# Altium PCB PCB1.PcbDoc
Units mm, origin at the board's own origin, x right, y up, seen from the top; angles counter-clockwise.
Board outline 42 x 21 mm, 2 copper layers (Top Layer, Bottom Layer); 66 components, 73 nets, 223 pads, 101 vias.
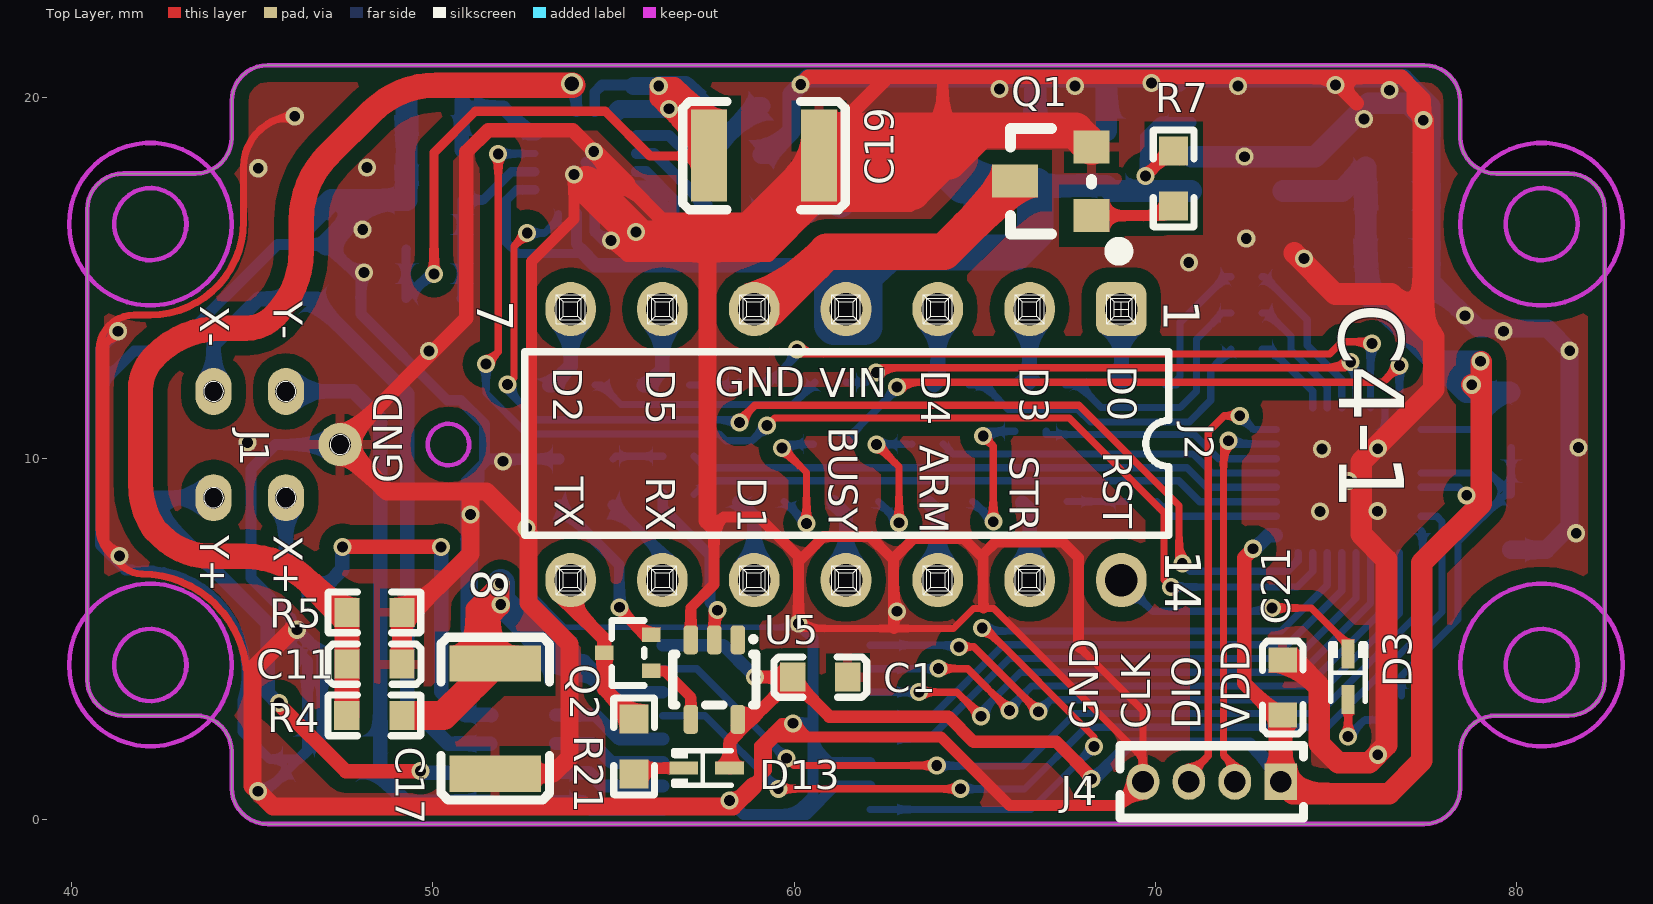
[diagram p0: Top Layer view]
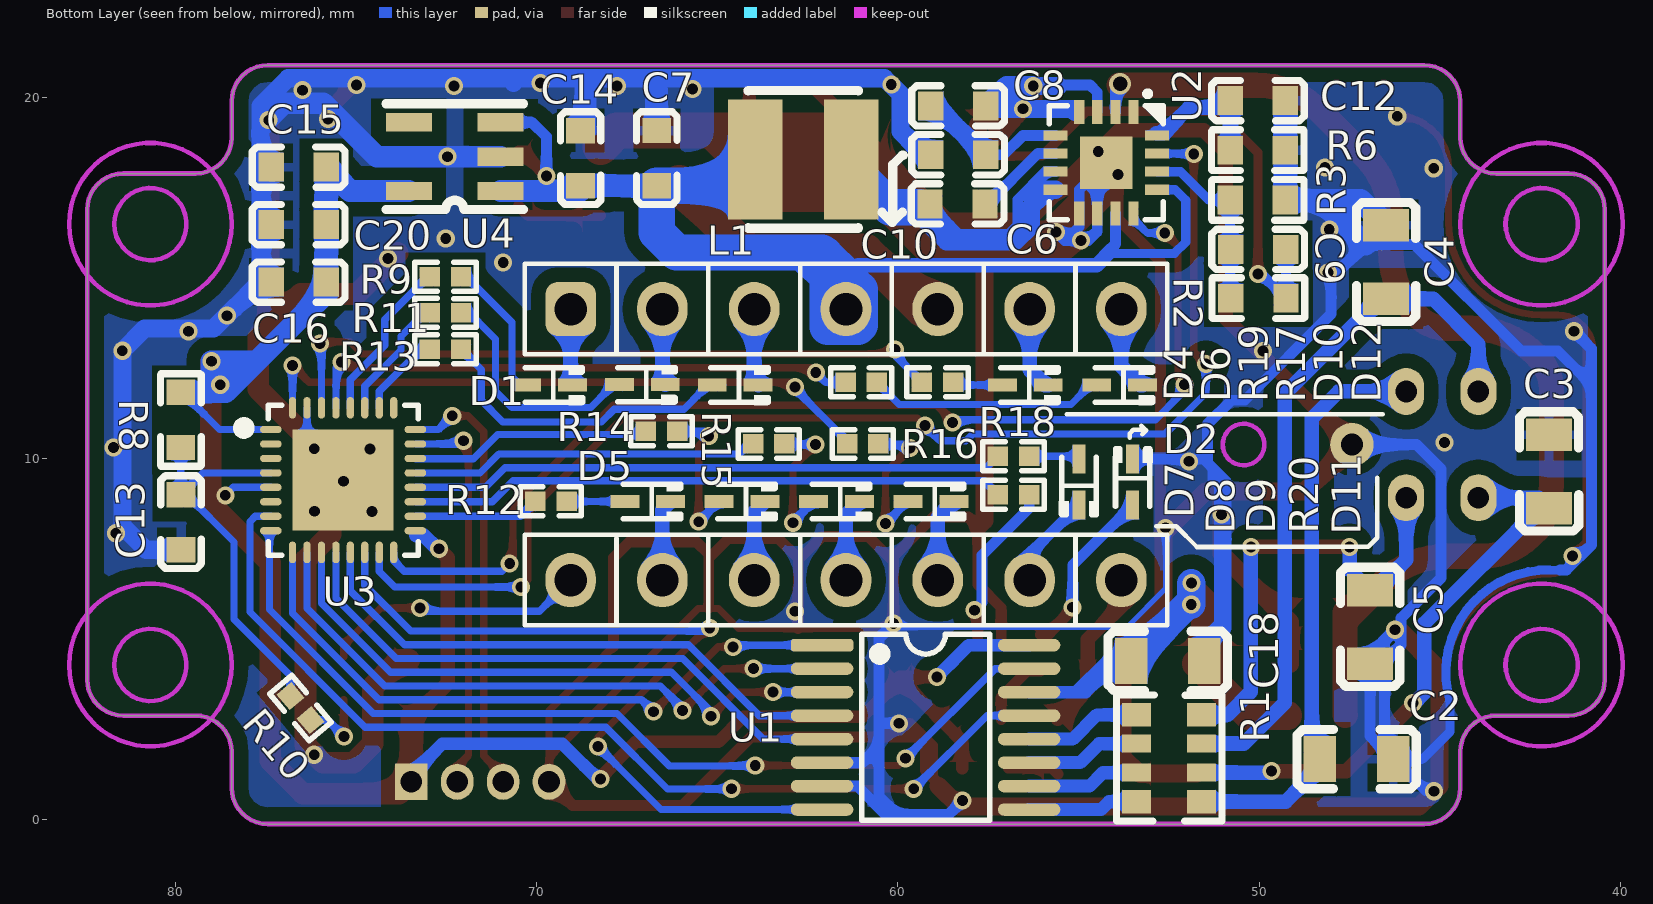
[diagram p1: Bottom Layer view, seen from below]

## Layer stack, top to bottom
Top Solder: solder mask 0.0102, Solder Resist, Dk 3.5
Top Layer: signal copper 0.0356
Dielectric1: dielectric 0.32, FR-4, Dk 4.8
Bottom Layer: signal copper 0.0356
Bottom Solder: solder mask 0.0102, Solder Resist, Dk 3.5

## Board outline
41.434,2.884 43.434,2.884 cw(c43.434,1.884) 44.434,1.884 44.434,0.884 ccw(c45.434,0.884) 45.434,-0.116 77.434,-0.116 ccw(c77.434,0.884) 78.434,0.884 78.434,1.884 cw(c79.434,1.884) 79.434,2.884 81.434,2.884 ccw(c81.434,3.884) 82.434,3.884 82.434,16.884 ccw(c81.434,16.884) 81.434,17.884 79.434,17.884 cw(c79.434,18.884) 78.434,18.884 78.434,19.884 ccw(c77.434,19.884) 77.434,20.884 45.434,20.884 ccw(c45.434,19.884) 44.434,19.884 44.434,18.884 cw(c43.434,18.884) 43.434,17.884 41.434,17.884 ccw(c41.434,16.884) 40.434,16.884 40.434,3.884 ccw(c41.434,3.884)

## Design rules (kind name [scope] priority, off if disabled: settings)
Clearance [All] p1: gap=0.4
PolygonConnect PolygonConnect_1 [IsVia] p1: connectstyle=Direct reliefconductorwidth=0.254 reliefentries=4 polygonreliefangle="90 Angle" airgapwidth=0.254
PolygonConnect [All] p2: connectstyle=Relief reliefconductorwidth=0.254 reliefentries=4 polygonreliefangle="90 Angle" airgapwidth=0.254
RoutingVias [All] p1: holewidth=0.3 width=0.5 viastyle="Through Hole" minholewidth=0.15 minwidth=0.2 maxholewidth=0.711 maxwidth=1.27
SilkToSolderMaskClearance SilkscreenOverComponentPads [IsPad] p1: minsilkscreentomaskgap=0.254 clearancetoexposedcopper=TRUE
SolderMaskExpansion [All] p1: expansion=0.102
Width [All] p1: maxlimit=2.54 minlimit=0.01 preferedwidth=0.254
29 further rules are at their usual default settings.

## Classes and differential pairs
component class DAC_PART: C1 C2 C3 C4 C5 C18 J1 R1 U1
component class DC_BOOST_PART: C6 C7 C8 C9 C10 C11 C12 C17 C19 L1 R2 R3 R4 R5 R6 U2
component class MCU_PART: C13 J4 R8 U3
component class POWER_PART: C14 C15 C16 C20 C21 D1 D2 D3 D4 D5 D6 D7 D8 D9 D10 D11 D12 D13 J2 Q1 Q2 R7 R9 R10 R11 R12 R13 R14 R15 R16 R17 R18 R19 R20 R21 U4 U5

## Components (designator, comment, footprint, x,y, rotation, side; value= is the part's Value field where it differs from the comment)
C1 "106/25V" 0603C/1 60.722,3.95 r180 top
C2 "104/200V" 0805C 47.304,1.68 r0 bottom
C3 "104/200V" 0805C 41.98,9.64 r270 bottom
C4 "104/200V" 0805C 46.49,15.436 r270 bottom
C5 "104/200V" 0805C 46.93,5.34 r90 bottom
C6 "104/100V" 0603C/1 58.347,17.043 r0 bottom
C7 "106/25V" 0603C/1 66.67,18.311 r90 bottom
C8 "224/50V" 0603C/1 58.329,19.758 r0 bottom
C9 "103/200V" 0603C/1 50.028,15.787 r0 bottom
C10 "224/50V" 0603C/1 58.329,18.404 r0 bottom
C11 "103/200V" 0603C/1 48.388,4.309 r0 top
C12 "104/100V" 0603C/1 50.037,19.901 r180 bottom
C13 "105" 0603C/1 79.836,8.236 r90 bottom
C14 "104" 0603C/1 68.78,18.31 r270 bottom
C15 "106/25V" 0603C/1 76.58,18.06 r180 bottom
C16 "104" 0603C/1 76.58,14.88 r180 bottom
C17 "334/200V" 1210c 51.73,2.8 r270 top
C18 "104/200V" 0805C 52.53,4.4 r0 bottom
C19 "334/200V" 1210c 59.164,18.38 r0 top
C20 "106/25V" 0603C/1 76.58,16.47 r180 bottom
C21 "106/25V" 0603C/1 73.52,3.66 r270 top
D1 "1N4148WT" SOD-523_L1.2-W0.8 69.64,12.03 r0 bottom
D2 "1N4148WT" SOD-523_L1.2-W0.8 53.5,9.35 r270 bottom
D3 "1N4148WT" SOD-523_L1.2-W0.8 75.33,3.959 r270 top
D4 "1N4148WT" SOD-523_L1.2-W0.8 67.07,12.04 r0 bottom
D5 "1N4148WT" SOD-523_L1.2-W0.8 66.92,8.81 r0 bottom
D6 "1N4148WT" SOD-523_L1.2-W0.8 64.5,12.03 r0 bottom
D7 "1N4148WT" SOD-523_L1.2-W0.8 64.308,8.81 r0 bottom
D8 "1N4148WT" SOD-523_L1.2-W0.8 61.696,8.81 r0 bottom
D9 "1N4148WT" SOD-523_L1.2-W0.8 59.084,8.81 r0 bottom
D10 "1N4148WT" SOD-523_L1.2-W0.8 56.472,12.03 r0 bottom
D11 "1N4148WT" SOD-523_L1.2-W0.8 54.99,9.35 r90 bottom
D12 "1N4148WT" SOD-523_L1.2-W0.8 53.86,12.03 r0 bottom
D13 "1N4148WT" SOD-523_L1.2-W0.8 57.58,1.43 r0 top
J1 "CON5" DUT_1XN_1.2_2.0 45.684,10.384 r0 top locked
J2 "DCOM14" DIP14-300 61.434,10.384 r270 top locked
J4 "J-LINK SWD" HDR-TH_4P-P1.27-V-0.6 71.557,1.052 r180 top
L1 "SNR4018K-100M" L3.0-W3.0 62.617,18.277 r0 bottom
Q1 "AO3454" SOT-23-N 68.23,16.72 r90 top
Q2 "WST6008" SOT-523-3_L1.6-W0.8-P1.00-LS1.6 55.4,4.62 r0 top
R1 "0R" 4R0603/1 52.496,1.706 r180 bottom
R2 "1M" 0603R/1#1 50.021,14.434 r180 bottom
R3 "20K" 0603R/1#1 50.042,17.153 r0 bottom
R4 "51R" 0603R/1#1 48.383,2.89 r180 top
R5 "1M" 0603R/1#1 48.385,5.74 r0 top
R6 "10K" 0603R/1#1 50.042,18.529 r0 bottom
R7 "10K" 0603R/1#2 70.5,17.75 r90 top
R8 "5K6" 0603R/1#1 79.842,11.066 r90 bottom
R9 "1K" 0402R/1 72.52,15.03 r180 bottom
R10 "1K" 0402R/1 76.528,3.092 r50 bottom
R11 "1K" 0402R/1 72.52,14.025 r180 bottom
R12 "1K" 0402R/1 69.6,8.81 r0 bottom
R13 "1K" 0402R/1 72.52,13.02 r180 bottom
R14 "1K" 0402R/1 66.54,10.75 r0 bottom
R15 "1K" 0402R/1 63.57,10.4 r0 bottom
R16 "1K" 0402R/1 60.97,10.4 r0 bottom
R17 "1K" 0402R/1 58.903,12.105 r180 bottom
R18 "1K" 0402R/1 56.797,10.06 r0 bottom
R19 "1K" 0402R/1 61.01,12.105 r180 bottom
R20 "1K" 0402R/1 56.797,9 r0 bottom
R21 "1K" 0603R/1#2 55.57,2.03 r270 top
U1 "AD5504" TSSOP-16_L5.0-W4.4-P0.65-LS6.4-BL 59.231,2.558 r270 bottom locked
U2 "LT3482" QFN-16_L3.0-W3.0-P0.50-BL-EP1.7 54.23,18.186 r0 bottom
U3 "AT32F415KBU7-4" QFN-32_L4.0-W4.0-P0.40-BL-EP2.7 75.35,9.4 r270 bottom
U4 "SPX3819M5-L-3-3" SOT-23-5 70.99,17.4 r0 bottom
U5 "SN74LVC1G04DCKR" SC-70-5_L2.1-W1.3-P0.65-LS2.1-TL 57.79,3.88 r270 top

## Footprints (in the part's own frame and the unit in brackets; to place one, negate y for a bottom-side part, rotate by r counter-clockwise, add the part's x,y. Pads: shape width x height; smd on the part's side, far side on the other; paste and mask are expansions set on the pad)
4R0603/1 [mm]
  rect 0.8x0.65 smd: 1(-0.9,1.2) 2(0.9,1.2) 7(-0.9,-1.2) 8(0.9,-1.2)
  rect 0.8x0.5 smd: 3(-0.9,0.4) 4(0.9,0.4) 5(-0.9,-0.4) 6(0.9,-0.4)
  silkscreen extent -1.45,-1.74 1.47,1.75
0402R/1 [mm]
  rect 0.566x0.54 smd paste-100 mask+0.051: 1(-0.433,0) 2(0.433,0)
  silkscreen extent -0.84,-0.4 0.85,0.4
0603C/1 [mm]
  rect 0.7x0.8 smd: 1(-0.762,0) 2(0.762,0)
  silkscreen extent -1.28,-0.56 1.28,0.56
0603R/1#1 [mm]
  rect 0.7x0.8 smd: 1(-0.762,0) 2(0.762,0)
  silkscreen extent -1.28,-0.56 1.28,0.56
0603R/1#2 [mm]
  rect 0.8x0.8 smd: 1(-0.762,0) 2(0.762,0)
  silkscreen extent -1.34,-0.56 1.34,0.57
0805C [mm]
  rect 0.9x1.27 smd: 1(-1.016,0) 2(1.016,0)
  silkscreen extent -1.65,-0.82 1.65,0.82
1210c [mm]
  rect 1x2.54 smd: 1(-1.524,0) 2(1.524,0)
  silkscreen extent -2.25,-1.5 2.25,1.5
DIP14-300 [mm] "19*7.6*3.8(长宽高）"
  rrect50% 1.5x1.4 hole 0.9: 1(-3.75,7.62)
  oval 1.5x1.4 hole 0.9: 2(-3.75,5.08) 3(-3.75,2.54) 4(-3.75,0) 5(-3.75,-2.54) 6(-3.75,-5.08) 7(-3.75,-7.62) 8(3.75,-7.62) 9(3.75,-5.08) 10(3.75,-2.54) 11(3.75,0) 12(3.75,2.54) 13(3.75,5.08) 14(3.75,7.62)
  silkscreen extent -5.45,-8.89 2.51,8.93
DUT_1XN_1.2_2.0 [mm]
  oval 1x1.3 hole 0.6: 1(0.25,-1.47) 2(-1.75,1.47) 3(-1.75,-1.47) 4(0.25,1.47)
  round 1.2 hole 0.6: 5(1.75,0)
  silkscreen extent -2.02,-1.74 2.03,1.74
HDR-TH_4P-P1.27-V-0.6 [mm]
  rect 0.9x1 hole 0.6: 1(-1.905,0)
  oval 0.9x1 hole 0.6: 2(-0.635,0) 3(0.635,0) 4(1.905,0)
  silkscreen extent -2.54,-1 2.54,1
L3.0-W3.0 [mm]
  rect 1.5x3.32 smd: 1(1.328,0) 2(-1.328,0)
  silkscreen extent -1.52,-1.91 1.52,1.91
QFN-16_L3.0-W3.0-P0.50-BL-EP1.7 [mm]
  rect 0.28x0.665 smd: 1(-0.75,-1.407) 2(-0.25,-1.407) 3(0.25,-1.407) 4(0.75,-1.407) 9(0.75,1.407) 10(0.25,1.407) 11(-0.25,1.407) 12(-0.75,1.407)
  rect 0.665x0.28 smd: 5(1.407,-0.75) 6(1.407,-0.25) 7(1.407,0.25) 8(1.407,0.75) 13(-1.407,0.75) 14(-1.407,0.25) 15(-1.407,-0.25) 16(-1.407,-0.75)
  rect 1.45x1.45 smd: 17(0,0)
  silkscreen extent -1.58,-1.98 1.58,1.58
QFN-32_L4.0-W4.0-P0.40-BL-EP2.7 [mm]
  oval 0.2x0.6 smd: 1(-1.4,-2) 2(-1,-2) 3(-0.6,-2) 4(-0.2,-2) 5(0.2,-2) 6(0.6,-2) 7(1,-2) 8(1.4,-2) 17(1.4,2) 18(1,2) 19(0.6,2) 20(0.2,2) 21(-0.2,2) 22(-0.6,2) 23(-1,2) 24(-1.4,2)
  oval 0.6x0.2 smd: 9(2,-1.4) 10(2,-1) 11(2,-0.6) 12(2,-0.2) 13(2,0.2) 14(2,0.6) 15(2,1) 16(2,1.4) 25(-2,1.4) 26(-2,1) 27(-2,0.6) 28(-2,0.2) 29(-2,-0.2) 30(-2,-0.6) 31(-2,-1) 32(-2,-1.4)
  rect 2.8x2.8 smd: 33(0,0)
  silkscreen extent -2.08,-2.9 2.08,2.08
SC-70-5_L2.1-W1.3-P0.65-LS2.1-TL [mm]
  rrect50% 0.8x0.4 smd: 1(-1.1,0.65) 2(-1.1,0) 3(-1.1,-0.65) 4(1.1,-0.65) 5(1.1,0.65)
  silkscreen extent -1.19,-1.15 0.7,1.15
SOD-523_L1.2-W0.8 [mm]
  rect 0.8x0.36 smd paste+0 mask+0.051: 1(0.635,0) 2(-0.635,0)
  silkscreen extent -0.94,-0.54 0.68,0.55
SOT-23-5 [mil]
  rect 50x20 smd: 1(0,0) 2(0,-37.4) 3(0,-74.8) 4(100,-75) 5(100,0)
  silkscreen extent -25,-95 125,20
SOT-23-N [mm]
  rect 0.914x1 smd: 1(0,0) 3(1.9,0)
  rect 0.914x1.27 smd: 2(0.961,2.12)
  silkscreen extent -0.51,0 2.41,2.25
SOT-523-3_L1.6-W0.8-P1.00-LS1.6 [mm]
  rect 0.51x0.4 smd: 1(0.65,-0.5) 2(0.65,0.5) 3(-0.65,0)
  silkscreen extent -0.45,-0.9 0.45,0.9
TSSOP-16_L5.0-W4.4-P0.65-LS6.4-BL [mm]
  rrect50% 0.343x1.731 smd: 1(-2.275,-2.866)
  oval 0.343x1.731 smd: 2(-1.625,-2.866) 3(-0.975,-2.866) 4(-0.325,-2.866) 5(0.325,-2.866) 6(0.975,-2.866) 7(1.625,-2.866) 8(2.275,-2.866) 9(2.275,2.866) 10(1.625,2.866) 11(0.975,2.866) 12(0.325,2.866) 13(-0.325,2.866) 14(-0.975,2.866) 15(-1.625,2.866) 16(-2.275,2.866)
  silkscreen extent -2.58,-1.77 2.58,1.77

## Part data
C1 C2 C3 C4 C5 C6 C7 C8 C9 C10 C11 C12 C13 C14 C15 C16 C17 C18 C19 C20 C21: library part 电容, "Capacitor"
D1 D2 D3 D4 D5 D6 D7 D8 D9 D10 D11 D12 D13: library part DIODE_5
J1: "SOCKET"
J4: library part CON4, "SOCKET"
L1: library part 电感, "Inductor"
Q1: library part AO3400
Q2: library part MOS_N
R1: library part RES4/1
R2 R3 R4 R5 R6 R7 R9 R10 R11 R12 R13 R14 R15 R16 R17 R18 R19 R20 R21: library part RESS1, "Resistor"
R8: library part RES_4G
U3: library part AT32F415KBU7
U4: library part SPX3819/1
U5: library part SN74LVC1G04

## Via types
v1: diameter 0.5, hole 0.3, Top Layer to Bottom Layer, tented both sides, 100 vias
v2: diameter 0.6, hole 0.4, Top Layer to Bottom Layer, tented both sides, 1 vias

## Nets (pads, with @x,y where several pads share a name; then routed paths per layer and width w, separated by ;. In a path a pad name is that pad's centre, name@x,y a point inside that pad or via, vN(x,y) a via of type N, cw(c..) or ccw(c..) an arc to the next point about the centre after c; other vN are vias at no path point)
ALRAM: R14.2 U3.22 | length 6.7
  Bottom Layer w0.2: R14.2 66.973,10.66 71.07,10.66 71.74,9.99 73.34,9.99 U3.22
BOOST_FSET: U2.15 U3.15 | length 35.2
  Top Layer w0.2: v1(51.47,12.61) 51.809,12.949 v1(51.809,18.421) ; v1(59.25,10.91) 59.46,11.12 67.611,11.12 70.231,8.5 70.231,6.639 v1(70.43,6.44)
  Bottom Layer w0.2: v1(51.47,12.61) 51.47,11.81 52.6,10.68 57.92,10.68 58.11,10.49 58.83,10.49 v1(59.25,10.91) ; v1(51.809,18.421) 51.824,18.436 U2.15 ; v1(70.43,6.44) 73.92,6.44 74.35,6.87 U3.15
BOOST_SHDN: U2.12 U3.16 | length 31.5
  Top Layer w0.2: v1(52.07,12.05) 52.25,12.23 52.25,15.877 v1(52.611,16.239) ; v1(58.49,10.99) 58.49,11.05 58.91,11.47 67.88,11.47 70.65,8.7 70.65,7.05 70.69,7.09 v1(70.74,7.09)
  Bottom Layer w0.2: v1(52.07,12.05) 52.07,11.87 52.87,11.07 58.41,11.07 v1(58.49,10.99) ; v1(52.611,16.239) 53.095,16.239 53.48,16.624 U2.12 ; v1(70.74,7.09) 70.95,6.88 73.66,6.88 73.95,7.17 U3.16
BUSY: R15.2 U3.21 | length 9.6
  Bottom Layer w0.2: R15.2@64.123,10.4 64.403,10.12 71.04,10.12 71.56,9.6 U3.21
D0: R9.1 U3.28 | length 4.6
  Bottom Layer w0.2: R9.1 73.01,15.03 74.2,13.84 74.2,13.13 75.15,12.18 U3.28
D1: R16.2 U3.32 | length 17.5
  Top Layer w0.2: v1(62.85,11.98) 62.98,12.11 76.29,12.11 v1(76.75,12.57)
  Bottom Layer w0.2: R16.2@61.403,10.39 R16.2 61.403,10.483 62.85,11.93 v1(62.85,11.98) ; U3.32 v1(76.75,12.57)
D2: R19.1 U3.29 | length 15.4
  Top Layer w0.2: v1(62.27,12.38) 62.4,12.51 75.24,12.51 v1@75.32,12.59
  Bottom Layer w0.2: R19.1 61.995,12.105 v1(62.27,12.38) ; v1(75.4,12.67) 75.55,12.52 U3.29
D3: R11.1 U3.27 | length 3.5
  Bottom Layer w0.2: R11.1 73.105,14.025 73.75,13.38 73.75,13 74.75,12 U3.27
D4: R13.1 U3.26 | length 2.3
  Bottom Layer w0.2: R13.1 73.19,13.02 74.35,11.86 U3.26
D5: R17.1 U3.30 | length 19.4
  Top Layer w0.2: v1(60.08,13.01) 60.2,12.89 74.82,12.89 75.16,13.23 75.94,13.23 v1(75.99,13.18)
  Bottom Layer w0.2: R17.1@59.23,12.16 59.336,12.266 R17.1 60.08,12.85 v1(60.08,13.01) ; U3.30 75.95,13.14 v1(75.99,13.18)
DAC__LDAC: U1.8 U3.14 | length 22.8
  Top Layer w0.2: v1(65.202,5.312) 65.282,5.312 68.3,2.294 v1(68.3,2.03)
  Bottom Layer w0.2: U1.8 66.553,0.283 v1(68.3,2.03) 68.3,2.073 68.34,2.113 68.32,2.133 v1@68.258,2.072 ; v1(65.202,5.312) 65.292,5.222 73.482,5.222 74.75,6.49 U3.14
DAC_ALARM: U1.15 U3.8 | length 26.1
  Top Layer w0.2: v1(59.784,1.702) 59.982,1.504 v1(63.944,1.504)
  Bottom Layer w0.2: U1.15 57.303,4.183 v1(59.784,1.702) ; v1(63.944,1.504) 63.955,1.493 66.323,1.493 67.772,2.942 74.514,2.942 77.39,5.817 77.39,7.96 U3.8
DAC_CLR: U1.1 U3.9 | length 18.2
  Top Layer w0.2: v1(64.563,4.787) 64.969,4.787 v1(66.764,2.992)
  Bottom Layer w0.2: U1.1 64.517,4.833 v1(64.563,4.787) ; v1(66.764,2.992) 66.764,2.995 67.091,3.322 74.357,3.322 76.75,5.715 U3.9
DAC_R_SET: U1.13 U3.7 | length 27.6
  Top Layer w0.2: v1(59.56,0.858) v1(64.606,0.859) v1(64.606,0.859)
  Bottom Layer w0.2: U1.13 57.535,2.883 v1(59.56,0.858) ; v1@64.606,0.855 66.377,0.855 68.084,2.562 74.742,2.562 77.93,5.75 77.93,8.25 77.78,8.4 U3.7
DAC_SYNC: U1.2 U3.10 | length 17.6
  Top Layer w0.2: v1(63.996,4.183) 64.803,4.183 v1(65.959,3.027)
  Bottom Layer w0.2: U1.2 v1(63.996,4.183) ; v1(65.959,3.027) 65.896,3.027 66.571,3.702 74.199,3.702 76.35,5.852 U3.10
GND: C1.1 C2.1 C3.1 C4.1 C5.1 C7.2 C10.2 C11.2 C12.2 C13.1 C14.1 C15.1 C16.1 C17.2 C18.1 C19.2 C20.1 C21.1 D2.2 J1.5 J4.4 Q1.3 R3.1 R5.2 R6.1 U1.6 U1.7 U2.9 U2.10 U2.17 U3.31 U3.33 U4.2 U5.3 | length 401.2
  Top Layer w0.2: v1(41.29,13.52) 40.95,13.18 40.95,7.68 v1(41.33,7.3) ; 41.388,7.042 41.06,7.37 cw(c41.76,8.07) 40.77,8.07 40.77,13 cw(c41.74,13) 41.74,13.97 42.18,13.97 ccw(c42.18,16.55) 44.76,16.55 44.76,18.05 cw(c46.18,18.05) v1(46.18,19.47) ; 41.388,7.042 ccw(c41.96,7.615) 41.947,6.805 ; 41.96,6.805 cw(c41.96,7.615) 41.947,6.805 ; 44.84,4.18 ccw(c41.93,3.88) 41.947,6.805 ; v1(60.12,5.43) 60.253,5.297 62.76,5.297 64.407,5.297 64.96,5.85 65.52,5.85 69.652,1.718 ; 67.92,4.75 69.652,3.018 69.652,1.718 ; J4.4 69.652,1.718
  Top Layer w0.3: v1@52.65,7.86 52.68,7.89 52.73,7.94 52.73,15.45 53.909,16.629 v1(53.909,17.856) ; v1(54.93,16.03) 55.37,15.59 57.52,15.59 59.3,15.59 60.68,16.97 63.22,16.97 64.11,17.86 64.11,18.22 64.11,18.81 64.11,19.07 64.11,20.471 ; U5.3 57.14,5.87 57.78,6.51 57.78,8.11 58.05,8.38 59.02,8.38 60.12,7.28 60.12,7.14 ; v1(58.212,0.532) 58.402,0.532 59.04,1.17 ; v1(60.12,5.43) 60.12,7.14 ; 60.36,2.29 64.064,2.29 65.956,0.398 68.998,0.398 J4.4 ; 62.76,5.297 62.75,5.307 62.75,7.28 ; 65.24,5.862 65.24,5.95 65.23,5.96 65.23,7.35 ; 67.92,4.75 67.87,4.8 67.87,7.25 67.43,7.69 65.57,7.69 65.23,7.35 ; 59.04,1.17 59.04,1.84 ; 59.04,1.17 59.234,1.364 59.234,2.034 ; 59.04,1.84 59.234,2.034 ; 59.04,1.84 59.04,2.05 59.4,2.41 ; 59.234,2.034 59.49,2.29 60.35,2.29 v1(59.97,2.67) ; 59.4,2.41 59.66,2.67 v1(59.97,2.67) ; 59.4,2.41 59.71,2.41 v1(59.97,2.67) ; 60.12,7.14 60.82,7.84 62.1,7.84 62.66,7.28 62.75,7.28 ; 62.75,7.28 62.775,7.255 63.3,7.78 64.69,7.78 65.175,7.295 65.23,7.35
  Top Layer w0.4: J1.5 50.93,13.88 50.93,18.481 51.53,19.081 53.872,19.081 v1(54.455,18.498) ; 55.362,17.591 56.353,16.6 58.63,16.6 62.49,20.461 ; v1@60.29,20.461 60.392,20.562 74.838,20.562 ; 75.57,19.83 74.838,20.562 ; 74.838,20.562 76.808,20.562 77.15,20.221 ; 77.15,20.221 77.41,19.96 v1(77.41,19.36) 77.15,19.62 77.15,20.221
  Top Layer w0.5: v1(46.24,5.26) 46.12,5.26 45.01,4.15 45.01,0.94 v1(45.16,0.79) 45.58,0.37 58.301,0.37 58.87,0.94 ; J1.5 48.728,9.09 50.88,9.09 ; C11.2 49.15,5.47 51.04,7.36 v1(51.04,8.45) 51.04,8.93 50.88,9.09 ; C17.2 53.326,1.276 53.78,1.73 53.78,4.87 52.65,6 v1@52.65,7.86 ; v1@52.68,7.89 51.48,9.09 50.88,9.09 ; v1(53.909,17.856) 54.174,17.591 54.239,17.591 55.362,17.591 v1(54.455,18.498) ; 57.63,16.09 57.52,15.98 57.52,15.59 57.6,15.51 57.6,8.29 57.78,8.11
  Top Layer w0.6: C21.1 73.798,4.422 74.53,3.69 74.53,2.11 75.06,1.58 75.91,1.58 76.39,2.06 76.39,7.2 75.69,7.9 75.69,9.91 77.7,11.92 77.7,13.37 77.41,13.66 ; 73.835,15.685 74.97,14.55 76.52,14.55 77.41,13.66 ; v1(77.41,19.36) 77.41,13.66
  Top Layer w1: 54.239,17.591 55.74,16.09 57.63,16.09 59.02,16.09 62,19.07 63.16,19.07 ; Q1.3 67.78,19.07 65.134,19.07 ; 62.68,17.38 61.47,17.38 63.16,19.07 ; 62.68,17.38 63.52,18.22 ; 62.68,17.38 63.27,17.38 64.11,18.22 ; 63.16,19.07 64.11,19.07 64.37,19.07 ; 63.52,18.22 64.11,18.22 ; 63.52,18.22 64.11,18.81 64.37,19.07 ; 64.11,18.22 64.284,18.22 65.134,19.07 ; 64.37,19.07 65.134,19.07
  Bottom Layer w0.15: v1(52.59,8.08) 52.59,6.4 53.665,5.325 60.015,5.325 v1(60.12,5.43)
  Bottom Layer w0.2: U3.33 76.35,10.4 U3.31
  Bottom Layer w0.254: 41.678,6.897 cw(c42.004,4.086) 44.725,3.304 ; 44.72,3.32 44.72,2.44 45.48,1.68 C2.1 45.398,0.79 v1(45.16,0.79)
  Bottom Layer w0.3: v1(41.29,13.52) 40.807,13.037 40.807,12.037 ; 41.678,6.917 41.493,6.917 40.807,7.603 40.807,12.037 ; v1(46.24,5.26) 46.93,4.57 C5.1 46.93,2.322 C2.1@46.53,1.922 ; C2.1 C2.1@46.53,1.922 ; J1.5 45.644,10.384 44.97,9.71 44.97,6.69 46.08,5.58 46.08,4.84 46.53,4.39 C2.1@46.53,1.922 ; C18.1@51.481,4.721 50.91,5.292 50.91,9.36 51.275,9.725 ; C18.1 51.64,4.526 51.64,4.9 51.1,5.44 51.1,9.25 51.275,9.425 51.275,9.725 ; D2.2 51.535,9.985 51.43,9.88 ; U2.17 U2.17@54.48,17.936 ; v1@55.501,16.257 55.501,16.23 55.16,16.23 54.98,16.41 U2.9 54.98,17.436 U2.17@54.48,17.936 ; v1(55.62,16.27) 55.38,16.03 v1(54.93,16.03) 54.73,16.03 54.48,16.28 U2.10 U2.17@54.48,17.936 ; v1(58.212,0.532) 58.597,0.148 60.02,0.148 ; v1(59.97,2.67) 60.5,2.67 60.52,2.69 ; v1(60.12,5.43) 60.52,5.03 60.52,2.69 ; U1.7 61.124,0.933 60.339,0.148 60.02,0.148 ; U1.6 60.977,1.583 60.52,2.04 ; 40.807,12.037 41.74,12.97 42.75,12.97 45.702,15.922 47.06,15.922 48.01,14.972 48.01,14 50.4,11.61 50.77,11.61 51.43,10.95 51.43,9.88 ; 51.275,9.725 51.43,9.88 ; 60.02,0.148 60.52,0.648 60.52,2.04 ; 60.52,2.04 60.52,2.69
  Bottom Layer w0.5: C10.2 59.273,18.404 59.924,19.055 59.924,20.081 60.364,20.52 70.511,20.52 ; 70.635,20.396 70.511,20.52 ; 76.91,19.83 77.38,19.36 v1(77.41,19.36) 77.41,19.33 77.642,19.098 ; C13.1 80.804,7.474 81.46,8.13 ; v1(81.64,7.93) 81.46,8.11 81.46,8.13 ; 70.511,20.52 76.88,20.52 77.642,19.758 77.642,19.098 ; 77.642,19.098 77.642,14.88 78.932,13.59 80.85,13.59 v1(81.46,12.98) 81.46,8.13
  Bottom Layer w0.6: C4.1 47.191,17.153 48.291,17.153 ; 47.06,15.922 48.291,17.153 ; C12.2 49.275,17.157 R3.1 48.291,17.153 ; C7.2 66.67,20.24 ; 68.62,20.321 68.64,20.301 C14.1@68.64,19.072 ; U4.2 74.42,18.35 75.9,19.83 76.91,19.83
  other v1: 76.15,1.8 62.85,5.77 74.55,8.53 76.14,8.54 75.34,9.37 51.94,9.92 74.61,10.26 76.15,10.27 81.7,10.3 44.87,10.44 49.89,12.97 79.63,13.52 78.56,13.95 48.1,15.15 70.92,15.42 74.11,15.53 72.51,16.09 48.06,16.34 45.17,18.03 48.18,18.05 72.461,18.351 75.77,19.39 76.47,20.19 65.68,20.22 67.77,20.31 72.28,20.31 74.98,20.33 60.18,20.35 69.89,20.39
LED_RED: U3.3
MCU_RXD: R18.2 U3.20 | length 16.5
  Bottom Layer w0.2: R18.2 57.55,9.74 70.87,9.74 71.41,9.2 U3.20
MCU_TXD: R20.2 U3.19 | length 16.5
  Bottom Layer w0.2: R20.2 57.61,9.38 70.64,9.38 71.22,8.8 U3.19
NetC6_1: C6.1 U2.6 | length 2.5
  Bottom Layer w0.3: U2.6 56.125,18.436 57.518,17.043 C6.1
NetC6_2: C6.2 L1.2 U2.7 U2.8 | length 14.2
  Bottom Layer w0.3: U2.7 55.902,17.936 56.68,17.158 56.68,16.452 56.931,16.201 58.324,16.201 59.109,16.987 C6.2
  Bottom Layer w0.5: U2.8 55.861,17.436 56.32,16.977 56.32,16.434 56.754,16 58.647,16 59.109,16.463 ; C6.2@59.109,16.987 59.109,16.463 ; C6.2@59.406,16.953 59.406,16.76 59.109,16.463
  Bottom Layer w0.8: L1.2@61.289,17.072 61.289,18.031 L1.2
  Bottom Layer w1: C6.2@59.406,16.953 60.211,16.953 L1.2@61.289,18.031
NetC8_1: C8.1 C9.1 C19.1 R2.2 U2.3 U2.4 | length 30.4
  Top Layer w0.254: v1(50.032,15.108) 50.032,18.462 51.177,19.607 54.773,19.607 56.01,18.37 C19.1@57.38,18.37
  Top Layer w0.5: 57.118,19.676 56.887,19.676 ; v1(56.252,20.311) 56.887,19.676 ; v1(56.252,20.311) 56.252,19.955 v1(56.531,19.676) ; v1(56.252,20.311) 56.689,20.311 C19.1@57.503,19.497 ; v1(56.531,19.676) 56.887,19.676 ; v1(56.531,19.676) 56.71,19.497 ; 56.71,19.497 C19.1@57.503,19.497 ; 56.71,19.497 57.437,18.77 57.78,18.77 57.78,19.22 C19.1@57.503,19.497
  Bottom Layer w0.254: C9.1 49.259,15.78 R2.2 49.933,15.108 v1(50.032,15.108)
  Bottom Layer w0.3: U2.3 54.48,20.133 54.682,20.335 55.824,20.335 55.848,20.311 ; v1(56.252,20.311) 56.498,20.311 57.135,19.674 ; 56.99,20.335 57.014,20.311
  Bottom Layer w0.5: U2.4@55.099,19.593 55.099,19.616 55.156,19.674 57.135,19.674 57.483,19.674 C8.1 57.014,20.311 v1@56.498,20.311 ; 55.556,20.311 55.848,20.311 v1(56.252,20.311) ; v1(56.531,19.676) 56.531,20.032 v1(56.252,20.311) ; 56.99,20.335 56.276,20.335 v1(56.252,20.311)
NetC8_2: C8.2 C10.1 U2.5 | length 4.2
  Bottom Layer w0.3: U2.5 56.539,18.936 57.071,18.404 C10.1 C10.1@57.569,18.404
  Bottom Layer w0.5: C10.1@57.569,18.404 57.603,18.404 58.957,19.758 C8.2
NetC9_2: C9.2 R2.1 R3.2 U2.14 | length 5.1
  Bottom Layer w0.254: R2.1 50.804,14.454 R3.2 51.394,17.153 52.176,17.936 U2.14
NetC11_1: C11.1 R4.2 R5.1 U2.2 | length 30.8
  Top Layer w0.7: R4.2 47.623,2.892 R5.1 47.41,5.74 46.604,6.546 ccw(c44.808,4.75) 44.808,7.29 43.865,7.29 cw(c43.865,9.255) 42.475,7.865 42.276,8.064 cw(c44.231,9.316) 41.91,9.316 41.91,11.893 cw(c43.207,11.893) 42.29,12.81 42.336,12.856 cw(c44.132,11.06) 44.132,13.6 44.827,13.6 ccw(c44.827,14.693) 45.6,13.92 45.616,13.936 ccw(c43.82,15.732) 46.36,15.732 46.36,16.598 cw(c48.9,16.598) 47.104,18.394 48.297,19.587 cw(c50.093,17.79) 50.093,20.33 v2@53.87,20.33
  Bottom Layer w0.3: v2(53.85,20.37) 53.879,20.37 53.94,20.432 53.98,20.392 U2.2
NetC12_1: C12.1 R6.2 U2.16 | length 3.8
  Bottom Layer w0.4: R6.2 50.799,18.533 C12.1 50.988,19.712 51.943,19.712 52.652,19.003 U2.16@52.845,19.003
NetD1_1: D1.1 R9.2 | length 4.1
  Bottom Layer w0.2: D1.1 D1.1@70.44,12.03 ; D1.1@70.58,12.03 D1.1@70.44,12.03 ; R9.2 71.94,15.03 70.68,13.77 70.68,12.27 D1.1@70.44,12.03
NetD1_2: D1.2 J2.1 | length 2.1
  Bottom Layer w0.4: D1.2@69.054,12.07 J2.1
NetD2_1: D2.1 Q2.2 | length 4.8
  Top Layer w0.3: v1(55.17,5.88) 55.17,5.82 55.87,5.12 Q2.2
  Bottom Layer w0.3: D2.1 55.16,7.055 55.16,5.89 v1(55.17,5.88)
NetD3_1: D3.1 R10.1 | length 2.1
  Top Layer w0.2: v1(75.33,2.31) D3.1
  Bottom Layer w0.2: v1(75.33,2.31) 75.78,2.76 R10.1
NetD3_2: D3.2 J2.14 | length 7.4
  Top Layer w0.2: v1(73.22,5.86) 74.31,5.86 75.33,4.84 D3.2 D3.2@75.33,4.505
  Bottom Layer w0.2: J2.14 69.918,5.77 73.13,5.77 v1(73.22,5.86)
NetD4_1: D4.1 R11.2 | length 6.8
  Bottom Layer w0.2: D4.1@67.515,12.03 D4.1@67.715,12.03 ; D4.1 D4.1@67.715,12.03 ; R11.2 71.855,14.025 71.13,13.3 71.13,11.86 70.68,11.41 68.5,11.41 67.88,12.03 D4.1@67.715,12.03
NetD4_2: D4.2 J2.2 | length 2.1
  Bottom Layer w0.4: D4.2 66.514,12.119 J2.2
NetD5_1: D5.1 R12.1 | length 1.6
  Bottom Layer w0.2: D5.1 R12.1
NetD5_2: D5.2 J2.13 | length 2.2
  Bottom Layer w0.4: D5.2@66.317,8.777 66.514,8.581 J2.13
NetD6_1: D6.1 R13.2 | length 9
  Bottom Layer w0.2: D6.1@64.84,12.03 65.04,12.03 D6.1@65.087,11.982 ; D6.1 65.25,12.03 65.92,11.36 67.85,11.36 68.2,11.01 70.93,11.01 71.53,11.61 71.53,12.463 R13.2
NetD6_2: D6.2 J2.3 | length 2.1
  Bottom Layer w0.4: D6.2 63.974,12.139 J2.3
NetD7_1: D7.1 R14.1 | length 4.3
  Top Layer w0.2: v1@65.11,10.58 v1@65.15,10.54 ; v1(65.23,10.62) 65.51,10.34 v1(65.51,8.25)
  Bottom Layer w0.2: D7.1 64.95,8.81 v1(65.51,8.25) ; v1(65.23,10.62) 65.36,10.75 R14.1
NetD7_2: D7.2 J2.12 | length 2.3
  Bottom Layer w0.4: D7.2@63.706,8.776 63.974,8.509 J2.12
NetD8_1: D8.1 R15.1 | length 4.1
  Top Layer w0.2: v1(62.28,10.39) 62.9,9.77 v1(62.9,8.22)
  Bottom Layer w0.2: v1(62.28,10.39) 63.127,10.39 R15.1 ; D8.1 62.9,8.241 v1(62.9,8.22) ; R15.1@63.247,10.39 R15.1@63.257,10.4
NetD8_2: D8.2 J2.11 | length 2.3
  Bottom Layer w0.4: D8.2@61.085,8.785 61.434,8.437 J2.11
NetD9_1: D9.1 R16.1 | length 4.2
  Top Layer w0.2: v1(59.66,10.29) 60.34,9.61 v1(60.34,8.2)
  Bottom Layer w0.2: v1(59.66,10.29) 59.76,10.39 R16.1@60.537,10.39 ; D9.1 59.73,8.81 v1(60.34,8.2)
NetD9_2: D9.2 J2.10 | length 2.3
  Bottom Layer w0.4: D9.2@58.474,8.784 58.894,8.365 J2.10
NetD10_1: D10.1 R17.2 | length 1.4
  Bottom Layer w0.2: D10.1 58.395,12.03 R17.2
NetD10_2: D10.2 J2.6 | length 2.4
  Bottom Layer w0.4: D10.2 55.93,12.03 56.354,12.454 J2.6
NetD11_1: D11.1 R18.1 | length 1.4
  Bottom Layer w0.2: D11.1 55.065,10.06 R18.1
NetD11_2: D11.2 J2.9 | length 2.6
  Bottom Layer w0.3: D11.2 56.354,7.351 J2.9
NetD12_1: D12.1 R19.2 | length 6.6
  Bottom Layer w0.2: D12.1 54.67,12.03 55.21,11.49 59.962,11.49 R19.2
NetD12_2: D12.2 J2.7 | length 2.4
  Bottom Layer w0.4: D12.2 53.29,12.03 53.814,12.554 J2.7
NetD13_2: D13.2 R21.2 | length 1.4
  Top Layer w0.3: R21.2 55.732,1.43 D13.2
NetJ2_8: J2.8 Q2.3 R21.1 | length 4.6
  Top Layer w0.4: J2.8 53.814,5.926 54.75,4.99 Q2.3 54.75,3.612 R21.1
NetQ1_1: Q1.1 R7.1 | length 2.4
  Top Layer w0.3: Q1.1 70.232,16.72 R7.1
NetQ2_1: Q2.1 U5.4 | length 2
  Top Layer w0.3: Q2.1 56.42,4.12 57.14,3.4 U5.4
NetR1_1: R1.1 U1.12 | length 3.2
  Bottom Layer w0.36: R1.1 54.49,2.906 55.163,2.233 U1.12
NetR1_3: R1.3 U1.11 | length 3.2
  Bottom Layer w0.36: R1.3 54.43,2.106 54.953,1.583 U1.11
NetR1_5: R1.5 U1.10 | length 3.1
  Bottom Layer w0.36: R1.5 54.324,1.306 54.697,0.933 U1.10
NetR1_7: R1.7 U1.9 | length 3.1
  Bottom Layer w0.36: R1.7 54.152,0.506 54.375,0.283 U1.9
NetR20_1: R20.1 U5.2 | length 4.7
  Top Layer w0.3: U5.2 57.79,5.79 57.8,5.8 v1(57.88,5.8)
  Bottom Layer w0.3: R20.1 56.364,8.626 57.67,7.32 57.67,6.01 v1(57.88,5.8)
NRST: C13.2 R8.1 R10.2 U3.4 | length 11
  Bottom Layer w0.2: R10.2 76.806,3.986 78.37,5.55 78.37,7.69 79.678,8.998 C13.2 ; U3.4 79.233,9.6 C13.2 ; R8.1 79.842,9.004 C13.2
OGND: J2.5 Q1.2 | length 8.6
  Top Layer w1: J2.5 59.314,14.134 60.9,15.72 64.149,15.72 Q1.2@66.049,17.621
PA13/SWDIO: J4.2 U3.23 | length 11
  Top Layer w0.2: v1(72.02,10.49) 71.88,10.35 71.88,1.79 72.192,1.478 J4.2
  Bottom Layer w0.2: v1(72.02,10.49) 72.11,10.4 U3.23
PA14/SWCLK: J4.3 U3.24 | length 12.1
  Top Layer w0.2: J4.3 70.922,1.232 71.46,1.77 71.46,10.74 71.9,11.18 v1(72.33,11.18)
  Bottom Layer w0.2: v1(72.33,11.18) 72.71,10.8 U3.24
SPI_CLK: U1.3 U3.11 | length 16.9
  Top Layer w0.2: v1(63.453,3.533) 64.504,3.533 v1(65.17,2.867)
  Bottom Layer w0.2: U1.3 v1(63.453,3.533) ; v1(65.17,2.867) 65.17,2.987 66.265,4.082 74.042,4.082 75.95,5.99 U3.11
SPI_SDI: U1.4 U3.13 | length 15.5
  Bottom Layer w0.2: U1.4 63.833,2.883 65.792,4.842 73.652,4.842 75.15,6.34 U3.13
SPI_SDO: U1.5 U3.12 | length 16.3
  Bottom Layer w0.2: U1.5 63.721,2.233 65.95,4.462 73.882,4.462 75.55,6.13 U3.12
STROBE: R12.2 U3.18 | length 3.5
  Bottom Layer w0.2: R12.2 70.443,8.4 U3.18
V_X+: C5.2 J1.1 R1.2 | length 12.7
  Top Layer w0.4: v1(47.5,7.55) v1(50.23,7.55)
  Bottom Layer w0.4: J1.1 45.934,7.196 C5.2@46.75,6.38 ; C5.2 47.5,6.926 v1(47.5,7.55) ; v1(50.23,7.55) 50.23,3.54 50.864,2.906 R1.2 R1.2@51.612,2.89
V_X-: C4.2 J1.2 R1.4 | length 19.7
  Bottom Layer w0.4: J1.2 43.934,13.164 45.188,14.418 46.8,14.418 46.8,14.28 49.29,11.79 49.29,3.24 50.424,2.106 R1.4
V_Y+: C3.2 J1.3 R1.6 | length 15.9
  Top Layer w0.4: v1(45.74,3.23) 45.74,3.2 47.59,1.35 v1(49.66,1.35)
  Bottom Layer w0.4: J1.3 42.27,8.914 C3.2 42.239,8.624 45.43,5.433 45.43,3.51 45.74,3.2 v1(45.74,3.23) ; v1(49.66,1.35) 49.704,1.306 R1.6
V_Y-: C2.2 J1.4 R1.8 | length 16.5
  Bottom Layer w0.4: J1.4@45.934,12.184 J1.4 47.796,11.854 48.54,11.11 48.54,1.23 49.264,0.506 R1.8
VCC_DAC: C17.1 C18.2 R4.1 U1.14 | length 17.1
  Top Layer w0.5: 51.15,3.744 51.15,5.83 v1(51.87,6.55) 51.87,5.97 v1(51.88,5.96) 51.88,5.89 51.62,5.63 51.62,4.434 C17.1
  Top Layer w0.8: R4.1@49.21,2.89 50.296,2.89 51.018,3.612 ; 51.15,3.744 C17.1
  Bottom Layer w0.35: C18.2@53.396,4.28 C18.2@53.396,4.33 ; U1.14 55.065,3.533 ; C18.2@53.94,4.4 C18.2 53.936,4.01 54.33,4.01 ; C18.2@53.94,4.4 54.198,4.4 55.065,3.533 ; C18.2@53.94,4.4 54.33,4.01 ; 54.33,4.01 54.807,3.533 55.065,3.533
  Bottom Layer w0.5: C18.2@53.509,4.443 53.546,4.443 53.589,4.443 C18.2
  Bottom Layer w0.8: v1@51.88,6.54 v1(51.88,5.96) 51.98,5.96 53.497,4.443 C18.2@53.509,4.443 ; C18.2 C18.2@53.546,4.443
VCC_IN: C7.1 C14.2 J2.4 L1.1 R7.2 U2.11 U2.13 U4.1 U4.3 | length 39.7
  Top Layer w0.3: v1(69.72,17.82) R7.2@70.412,18.512 ; R7.2@70.273,18.512 R7.2@70.412,18.512 ; R7.2 R7.2@70.412,18.512
  Bottom Layer w0.254: U2.13 52.325,17.436 52.034,17.145 52.034,15.986 52.346,15.674 53.982,15.674 ; 54.079,15.771 54.112,15.804
  Bottom Layer w0.3: U2.11 53.98,15.936 54.112,15.804 ; C14.2@68.64,17.548 C14.2@68.64,17.63 ; 69.7,17.4 69.72,17.42 v1(69.72,17.82) 69.72,18.9 70.12,19.3 U4.3
  Bottom Layer w0.4: 54.079,15.771 54.5,15.35 61.1,15.35 61.415,15.035 ; J2.4@61.05,14.518 J2.4
  Bottom Layer w0.6: C7.1 68.64,17.548 68.788,17.4 69.7,17.4 U4.1
  Bottom Layer w1: L1.1@63.945,18.793 L1.1 64.673,17.549 C7.1 66.67,16.25 66.124,15.704 62.651,15.704 ; J2.4 J2.4@61.927,13.641 ; J2.4 J2.4@61.939,14.134 ; J2.4 61.434,14.546 61.939,15.051 ; J2.4@61.927,13.641 61.099,13.641 61.05,13.69 61.05,14.518 61.05,14.67 61.415,15.035 62.02,15.64 62.03,15.64 62.094,15.704 62.651,15.704 ; J2.4@61.927,13.641 61.939,13.641 J2.4@61.939,14.134 ; J2.4@61.939,14.134 61.939,15.051 ; 61.939,15.051 62.651,15.704
VDD_3V3: C1.2 C15.2 C16.2 C20.2 C21.2 D13.1 J4.1 R8.2 U1.16 U3.1 U3.5 U3.17 U4.5 U5.5 | length 66.8
  Top Layer w0.2: v1(78.61,8.98) v1@78.69,8.9
  Top Layer w0.35: D13.1 58.215,2.165 C1.2@59.96,3.91 ; v1(58.92,3.95) C1.2 C1.2@59.96,3.91 ; v1(68.23,1.13) 68.23,1.181 67.255,2.156 64.964,2.156 64.265,2.855 60.975,2.855 59.96,3.87 C1.2@59.96,3.91
  Top Layer w0.4: v1(72.7,7.5) 72.45,7.25 72.45,3.78 C21.2@73.402,2.828
  Top Layer w0.6: C21.2@73.402,2.828 73.462,2.888 J4.1 73.794,0.72 76.46,0.72 77.37,1.63 77.37,7.11 79.01,8.75 79.01,11.78 ; v1(78.75,12.04) 79.01,11.78 ; v1@79.01,12.67 79.01,11.78
  Bottom Layer w0.2: U3.5 78.39,9.2 v1(78.61,8.98) ; U3.1 78.77,10.8 79.798,11.828 R8.2
  Bottom Layer w0.35: U1.16 58.037,4.833 v1(58.92,3.95) ; v1(68.23,1.13) 68.313,1.13 69.289,2.107 72.602,2.107 73.462,1.247 J4.1
  Bottom Layer w0.4: v1(72.7,7.5) 72.75,7.5 73.13,7.88 73.32,7.88
  Bottom Layer w0.6: U4.5 75.158,17.4 C15.2 C20.2 C16.2 75.818,14.612 77.74,12.69 ; v1(78.75,12.04) 78.75,12.45 v1(78.99,12.69) ; R8.2@79.798,11.828 78.99,11.828 ; 77.74,12.69 78.602,11.828 78.952,11.828 ; 77.74,12.69 78.09,12.69 ; 78.09,12.69 78.952,11.828 ; 78.09,12.69 v1(78.99,12.69) ; 78.952,11.828 78.99,11.828 ; 78.99,11.828 v1(78.99,12.69)
pads on no net: U2.1 U3.2 U3.6 U3.25 U4.4 U5.1

## Polygon pours and split planes (outlines as drawn)
GND on Top Layer "Top Layer-No Net" (solid, remove dead copper, pour order 4): 41.434,2.884 43.434,2.884 cw(c43.434,1.884) 44.434,1.884 44.434,0.884 ccw(c45.434,0.884) 45.434,-0.116 77.434,-0.116 ccw(c77.434,0.884) 78.434,0.884 78.434,1.884 cw(c79.434,1.884) 79.434,2.884 81.434,2.884 ccw(c81.434,3.884) 82.434,3.884 82.434,16.884 ccw(c81.434,16.884) 81.434,17.884 79.434,17.884 cw(c79.434,18.884) 78.434,18.884 78.434,19.884 ccw(c77.434,19.884) 77.434,20.884 45.434,20.884 ccw(c45.434,19.884) 44.434,19.884 44.434,18.884 cw(c43.434,18.884) 43.434,17.884 41.434,17.884 ccw(c41.434,16.884) 40.434,16.884 40.434,3.884 ccw(c41.434,3.884)
GND on Bottom Layer "Top Layer-No Net1" (solid, remove dead copper, pour order 5): 41.434,2.884 43.434,2.884 cw(c43.434,1.884) 44.434,1.884 44.434,0.884 ccw(c45.434,0.884) 45.434,-0.116 77.434,-0.116 ccw(c77.434,0.884) 78.434,0.884 78.434,1.884 cw(c79.434,1.884) 79.434,2.884 81.434,2.884 ccw(c81.434,3.884) 82.434,3.884 82.434,16.884 ccw(c81.434,16.884) 81.434,17.884 79.434,17.884 cw(c79.434,18.884) 78.434,18.884 78.434,19.884 ccw(c77.434,19.884) 77.434,20.884 45.434,20.884 ccw(c45.434,19.884) 44.434,19.884 44.434,18.884 cw(c43.434,18.884) 43.434,17.884 41.434,17.884 ccw(c41.434,16.884) 40.434,16.884 40.434,3.884 ccw(c41.434,3.884)

## Keep-outs
Keep-Out Layer:
  circle w0.127: c50.434,10.384 r0.575
  circle w0.127: c42.184,16.484 r1
  circle w0.127: c80.684,16.484 r1
  circle w0.127: c42.184,4.284 r1
  circle w0.127: c80.684,4.284 r1
  lines w0.127: 40.434,3.884 ccw(c41.434,3.884) 41.434,2.884 43.434,2.884 cw(c43.434,1.884) 44.434,1.884 44.434,0.884 ccw(c45.434,0.884) 45.434,-0.116 77.434,-0.116 ccw(c77.434,0.884) 78.434,0.884 78.434,1.884 cw(c79.434,1.884) 79.434,2.884 81.434,2.884 ccw(c81.434,3.884) 82.434,3.884 82.434,16.884 ccw(c81.434,16.884) 81.434,17.884 79.434,17.884 cw(c79.434,18.884) 78.434,18.884 78.434,19.884 ccw(c77.434,19.884) 77.434,20.884 45.434,20.884 ccw(c45.434,19.884) 44.434,19.884 44.434,18.884 cw(c43.434,18.884) 43.434,17.884 41.434,17.884 ccw(c41.434,16.884) 40.434,16.884 40.434,3.884
Multi-Layer:
  circle w0.127: c42.184,16.484 r2.25
  circle w0.127: c42.184,4.284 r2.25
  circle w0.127: c80.684,16.484 r2.25
  circle w0.127: c80.684,4.284 r2.25

## Silkscreen, mask and mechanical layers (free items; w line width, h text height)
Top Overlay:
  drawing of 266 lines, arcs and shapes, not listed
  text "Y-" at 45.593,14.351 h0.8 r270
  text "C4-1" at 75.08,14.29 h1.8 r270
  text "X-" at 43.561,14.224 h0.8 r270
  text "D0" at 68.68,12.57 h0.8 r270
  text "D2" at 53.33,12.52 h0.8 r270
  text "D3" at 66.24,12.52 h0.8 r270
  text "D5" at 55.91,12.47 h0.8 r270
  text "D4" at 63.52,12.45 h0.8 r270
  text "GND" at 57.8,11.72 h0.8
  text "VIN" at 60.7,11.69 h0.8
  text "BUSY" at 60.96,10.87 h0.8 r270
  text "ARM" at 63.47,10.36 h0.8 r270
  text "RST" at 68.55,10.19 h0.8 r270
  text "STR" at 65.97,10.07 h0.8 r270
  text "TX" at 53.37,9.5 h0.8 r270
  text "RX" at 55.91,9.49 h0.8 r270
  text "D1" at 58.44,9.48 h0.8 r270
  text "GND" at 49.16,9.32 h0.8 r90
  text "Y+" at 43.561,7.874 h0.8 r270
  text "X+" at 45.593,7.874 h0.8 r270
  text "GND" at 68.413,2.51 h0.8 r90
  text "CLK" at 69.857,2.51 h0.8 r90
  text "DIO" at 71.252,2.51 h0.8 r90
  text "VDD" at 72.608,2.51 h0.8 r90
Bottom Overlay:
  lines w0.127: 46.58,11.22 55.32,11.22 ; 46.73,9.47 46.73,7.8 46.978,7.552 50.077,7.552 50.08,7.55 51.72,7.55 52.29,8.12 52.85,8.12 ; 53.12,10.78 53.13,10.78 53.24,10.67 ; 53.15,10.79 53.15,10.8 53.26,10.91 ; 53.16,10.79 53.48,10.79 53.58,10.69 53.58,10.57
  lines w0.254: 59.851,18.392 59.878,18.392 60.139,18.131 60.139,16.57 ; 59.873,16.811 60.15,16.534 ; 60.163,16.536 60.44,16.813

## Text inside footprints (layer, text, board x,y; h text height)
J2: Top Overlay "1" at 70.224,14.394 h1 r270; Top Overlay "14" at 70.274,7.454 h1 r270; Top Overlay "7" at 51.234,14.374 h1 r270; Top Overlay "8" at 51.06,6.94 h1 r270